# Altium PCB Dongle2.PcbDoc
Units mil, origin at the board's own origin, x right, y up, seen from the top; angles counter-clockwise.
Board outline 6000 x 4000 mil, 2 copper layers (Top Layer, Bottom Layer); 39 components, 34 nets, 174 pads, 0 vias.
Unrouted connection lines stored in the file: 99.
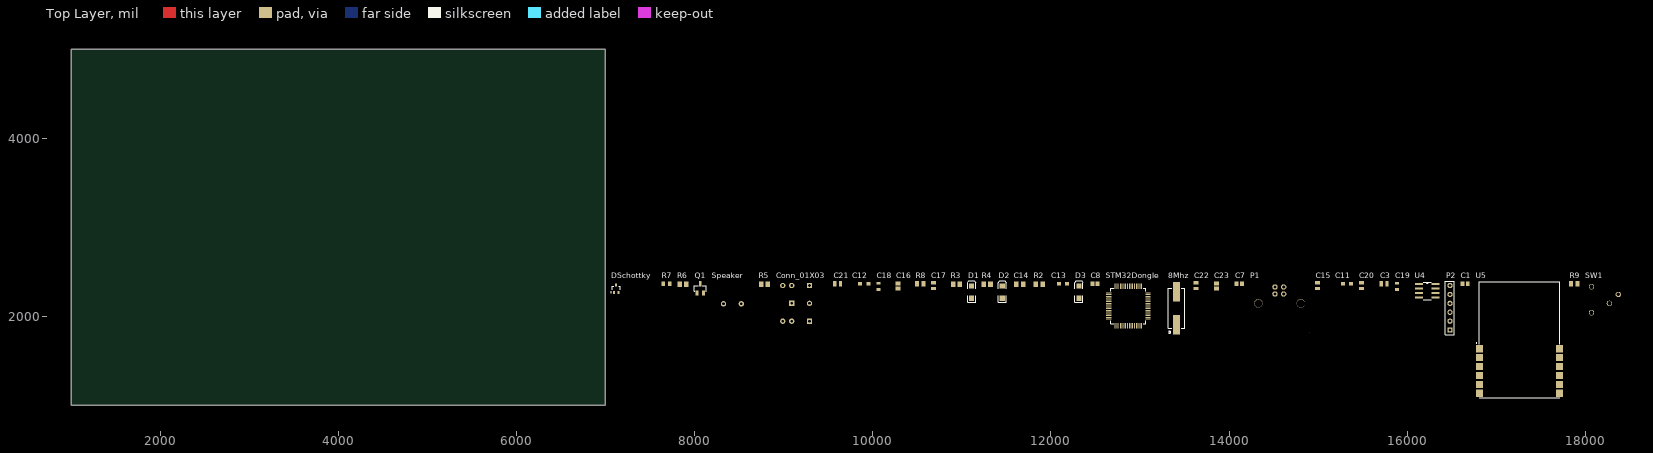
[diagram p0: Top Layer view]
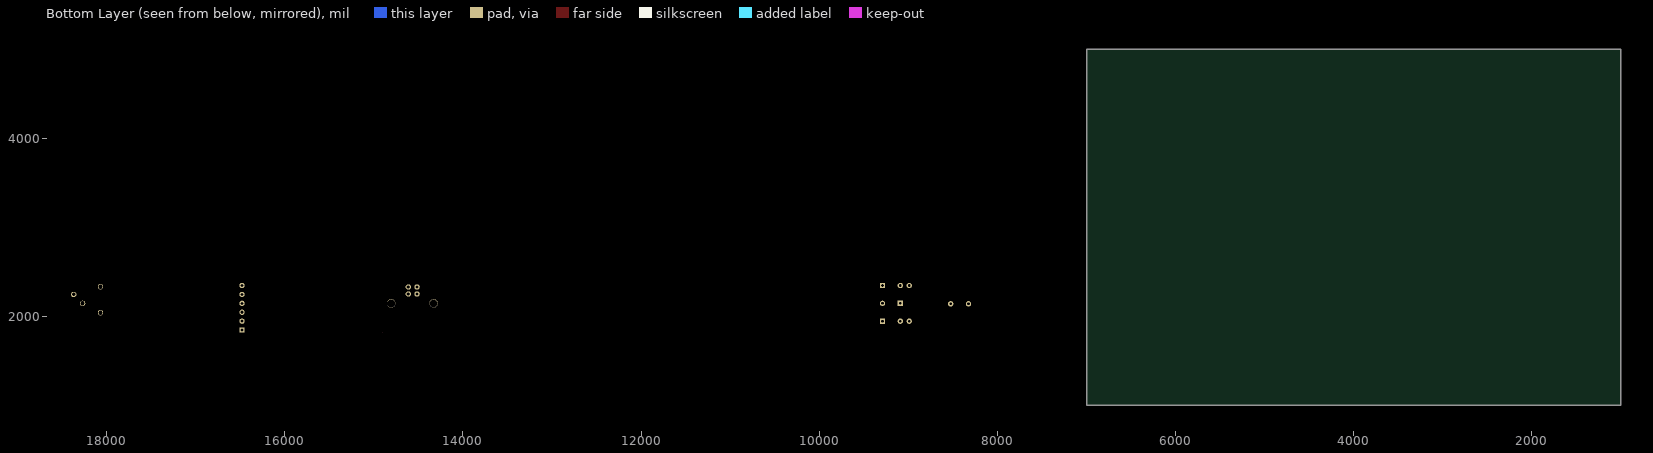
[diagram p1: Bottom Layer view, seen from below]

## Layer stack, top to bottom
Top Solder: solder mask 0.4, Solder Resist, Dk 3.5
Top Layer: signal copper 1.4
Dielectric 1: dielectric 12.6, FR-4, Dk 4.8
Bottom Layer: signal copper 1.4
Bottom Solder: solder mask 0.4, Solder Resist, Dk 3.5

## Board outline
1000,1000 7000,1000 7000,5000 1000,5000

## Design rules (kind name [scope] priority, off if disabled: settings)
Clearance [All] p1: gap=10
PolygonConnect [All] p1: connectstyle=Relief reliefconductorwidth=10 reliefentries=4 polygonreliefangle="90 Angle" airgapwidth=10
RoomDefinition Dongle [InComponentClass('Dongle')] p1: confinementstyle=ConfineIn formatcopy=TRUE lockcomponents=FALSE outline 7045,1060 18455,1060 18455,2505 7045,2505
RoutingVias [All] p1: holewidth=28 width=50 viastyle="Through Hole" minholewidth=28 minwidth=50 maxholewidth=28 maxwidth=50
SolderMaskExpansion [All] p1: expansion=4
Width [All] p1: maxlimit=10 minlimit=10 preferedwidth=10
30 further rules are at their usual default settings.

## Components (designator, comment, footprint, x,y, rotation, side; value= is the part's Value field where it differs from the comment)
8Mhz "X1" XTAL_ABLS2-24.000MHZ-D4YF-T 13410,2090 r90 top
C1 "Cap Pol3" C0805 16650,2365 r0 top
C3 "100nF" CAPC2013X110N 15740,2365 r0 top
C7 "15pF" C0805 14115,2365 r0 top
C8 "Cap Pol3" C0805 12495,2365 r0 top
C11 "1uF" INDC2012X87N 15325,2365 r0 top
C12 "1uF" INDC2012X87N 9905,2365 r0 top
C13 "1uF" INDC2012X87N 12135,2365 r0 top
C14 "10nF" CAPC2012X135N 11650,2360 r0 top
C15 "100nf" CAPC2013X110N 14995,2345 r90 top
C16 "Cap Pol3" C0805 10285,2340 r90 top
C17 "100nF" CAPC2013X110N 10680,2345 r90 top
C18 "4.7uF" 0805 10065,2335 r90 top
C19 "4.7uF" 0805 15885,2335 r90 top
C20 "100nF" CAPC2013X110N 15485,2345 r90 top
C21 "100nF" CAPC2013X110N 9605,2365 r0 top
C22 "100nF" CAPC2013X110N 13630,2345 r90 top
C23 "Cap Pol3" C0805 13860,2340 r90 top
Conn_01X03 "K1" PCBComponent_1#1 8915,2385 r0 top
D1 "LED2" 3.2X1.6X1.1 11110,2270 r90 top
D2 "LED2" 3.2X1.6X1.1 11455,2270 r90 top
D3 "LED2" 3.2X1.6X1.1 12315,2270 r90 top
DSchottky "D4" SOT65P210X110-3N 7120,2310 r90 top
P1 "USB_B" PCBComponent_1#2 14005,1995 r0 top
P2 "Header 6" HDR1X6 16480,1845 r90 top
Q1 "BC846A-7-F" SOT23-3 8050,2315 r0 top
R2 "100R" RESC2012X60 11870,2360 r0 top
R3 "100R" RESC2012X60 10940,2360 r0 top
R4 "100R" RESC2012X60 11285,2360 r0 top
R5 "100ohm" RESC2012X60 8785,2360 r0 top
R6 "100ohm" RESC2012X60 7870,2360 r0 top
R7 "2.2kr" RESC2013X65N 7685,2365 r0 top
R8 "1k" CAPC2012X140N 10535,2365 r0 top
R9 "1k" CAPC2012X140N 17875,2365 r0 top
Speaker "Speaker" Speaker 8225,2140 r0 top
STM32Dongle "U1" QFP50P1200X1200X160-64N 12870,2115 r90 top
SW1 "YELSW" PCBComponent_1#3 17520,1945 r0 top
U4 "LD1117D33TR" SOIC127P600X175-8N 16225,2285 r0 top
U5 "MRF24J40MDT-I/RM" XCVR_MRF24J40MDT-I/RM 17260,1385 r0 top

## Footprints (in the part's own frame and the unit in brackets; to place one, negate y for a bottom-side part, rotate by r counter-clockwise, add the part's x,y. Pads: shape width x height; smd on the part's side, far side on the other; paste and mask are expansions set on the pad)
3.2X1.6X1.1 [mm] "SMT LED; 2 Flat Leads"
  rect 1.5x1.5 smd: 1(-1.75,0) 2(1.75,0)
  silkscreen extent -2.9,-1.15 3.2,1.15
0805 [mm]
  rect 0.8x1.2 smd: P1(-0.9,0) P2(0.9,0)
C0805 [mm] "Chip Capacitor, Body 2.0x1.3mm, IPC High Density"
  rect 1.1x1.4 smd: 1(-0.75,0) 2(0.75,0)
  body extent -1.1,-0.72 1.1,0.72, height 1.4
CAPC2012X135N [mm]
  rect 1.3x1.5 smd: 1(-0.95,0) 2(0.95,0)
CAPC2012X140N [mil]
  rect 44x57 smd: 1(-36,0) 2(36,0)
CAPC2013X110N [mil]
  rect 36x57 smd: 1(-32,0) 2(32,0)
HDR1X6 [mm] "Connector; Header; 6 Position"
  rect 1.5x1.5 hole 0.9: 1(0,0)
  round 1.5 hole 0.9: 2(2.54,0) 3(5.08,0) 4(7.62,0) 5(10.16,0) 6(12.7,0)
  silkscreen extent -1.27,-1.27 13.97,1.27
INDC2012X87N [mm]
  rect 1.15x1 smd: 1(-1.175,0) 2(1.175,0)
PCBComponent_1#1 [mil]
  round 60 hole 30: 4(375,-240) 6(175,-440) 7(75,-440) 11(75,-40) 12(175,-40)
  rect 60x60 hole 30: R3(375,-40) S1(175,-240) T2(375,-440)
PCBComponent_1#2 [mil]
  round 60 hole 36.22: 1(608.43,333.62) 2(510,333.74) 3(510,255) 4(608.43,255)
  round 94.49 hole 90.55: 5(325,150) 5(800,150)
  Top Layer lines w10: 900,-179.45 900.28,-179.72
PCBComponent_1#3 [mil]
  round 60 hole 48.03: 1(550,386.73) 3(750,200) 7(550,95)
  round 60 hole 39.37: 10(850,300)
QFP50P1200X1200X160-64N [mil]
  rect 58x11 smd: 1(-221,148) 2(-221,128) 3(-221,108) 4(-221,89) 5(-221,69) 6(-221,49) 7(-221,30) 8(-221,10) 9(-221,-10) 10(-221,-30) 11(-221,-49) 12(-221,-69) 13(-221,-89) 14(-221,-108) 15(-221,-128) 16(-221,-148) 33(221,-148) 34(221,-128) 35(221,-108) 36(221,-89) 37(221,-69) 38(221,-49) 39(221,-30) 40(221,-10) 41(221,10) 42(221,30) 43(221,49) 44(221,69) 45(221,89) 46(221,108) 47(221,128) 48(221,148)
  rect 11x58 smd: 17(-148,-221) 18(-128,-221) 19(-108,-221) 20(-89,-221) 21(-69,-221) 22(-49,-221) 23(-30,-221) 24(-10,-221) 25(10,-221) 26(30,-221) 27(49,-221) 28(69,-221) 29(89,-221) 30(108,-221) 31(128,-221) 32(148,-221) 49(148,221) 50(128,221) 51(108,221) 52(89,221) 53(69,221) 54(49,221) 55(30,221) 56(10,221) 57(-10,221) 58(-30,221) 59(-49,221) 60(-69,221) 61(-89,221) 62(-108,221) 63(-128,221) 64(-148,221)
  silkscreen extent -197,-197 197,197
RESC2012X60 [mm]
  rect 1.3x1.5 smd: 1(-0.95,0) 2(0.95,0)
RESC2013X65N [mil]
  rect 40x55 smd: 1(-37,0) 2(37,0)
SOIC127P600X175-8N [mil]
  rect 86x22 smd: 1(-93,75) 2(-93,25) 3(-93,-25) 4(-93,-75) 5(93,-75) 6(93,-25) 7(93,25) 8(93,75)
  silkscreen extent -46,-98 46,99
SOT23-3 [mm]
  rect 0.8x1.5 smd: 1(-0.6,-1.35) 2(1.3,-1.35) 3(0.35,1.25)
  silkscreen extent -1.4,-0.85 2.1,0.75
SOT65P210X110-3N [mm] "SOT23, 3-Leads, Body 2.00x2.10mm, Pitch 0.65mm, IPC Medium Density"
  rect 0.8x0.55 smd: 1(-1.075,0.65) 2(-1.075,-0.65) 3(1.075,0)
  silkscreen extent -1.2,-1.1 0.67,1.6, body extent -0.67,-1.1 0.67,1.1, height 1.1
Speaker [mil]
  round 60 hole 30: 1(100,0) 2(300,0)
XCVR_MRF24J40MDT-I/RM [mil]
  rect 80x80 smd: 1(-450,250) 2(-450,150) 3(-450,50) 4(-450,-50) 5(-450,-150) 6(-450,-250) 7(450,-250) 8(450,-150) 9(450,-50) 10(450,50) 11(450,150) 12(450,250)
  silkscreen extent -486,-300 450,1000
XTAL_ABLS2-24.000MHZ-D4YF-T [mm]
  rect 5.6x2.1 smd: 1(-4.75,0) 2(4.75,0)
  silkscreen extent -7.15,-2.35 5.7,2.35

## Part data
8Mhz: library part 8Mhz
C1 C8 C16 C23: "Polarized Capacitor (Surface Mount)"
C3 C15 C17 C20 C21 C22: library part C0805C104K5RACTU, "Capacitor; Ceramic; Cap; .100UF ; Tol+-10%; SMD; Vol-Rtg 50V; X7R, Tape/Reel"
C7: library part "Cap Pol3", "Polarized Capacitor (Surface Mount)"
C11 C12 C13: library part C2012X5R1E105M085AC, "CAP CER 1UF 25V X5R 0805"
C14: library part GRM216R71H103KA01D, "CAP CER 10000PF 50V X7R 0805"
Conn_01X03: library part Conn_01X03
D1 D2 D3: "Typical RED, GREEN, YELLOW, AMBER GaAs LED"
DSchottky: library part DSchottky
P1 Speaker: library part Component_1
P2: "Header, 6-Pin"
Q1: "TRANS NPN 65V 0.1A SOT23-3"
R2 R3 R4 R5 R6: library part RC0805FR-07100RL, "RES SMD 100 OHM 1% 1/8W 0805"
R7: library part RC0805FR-072K2L, "RES SMD 2.2K OHM 1% 1/8W 0805"
R8 R9: library part 1kohm, "1276-5272-1-ND"
STM32Dongle: library part STM32Dongle, "497-11907-ND"
U4: "IC REG LINEAR 3.3V 800MA 8SO"
U5: "2.4 GHz IEEE 802.15.4 Certified Transceiver Module (+20 dBm), 12 MODULE Varies T/R"

## Nets (pads, with @x,y where several pads share a name; then routed paths per layer and width w, separated by ;. In a path a pad name is that pad's centre, name@x,y a point inside that pad or via, vN(x,y) a via of type N, cw(c..) or ccw(c..) an arc to the next point about the centre after c; other vN are vias at no path point)
3.3V: C1.1 C3.1 C12.1 C13.1 C14.1 C15.1 C17.1 C18.P1 C19.P1 C21.2 C22.1 DSchottky.1 P2.1 Speaker.1 STM32Dongle.1 STM32Dongle.13 STM32Dongle.14 STM32Dongle.15 STM32Dongle.19 STM32Dongle.20 STM32Dongle.21 STM32Dongle.32 STM32Dongle.48 STM32Dongle.64 SW1.3 U4.3
5V: C11.2 P1.1 U4.4
GND: C1.2 C3.2 C7.2 C8.2 C11.1 C12.2 C13.2 C14.2 C15.2 C16.2 C17.2 C18.P2 C19.P2 C20.2 C21.1 C22.2 C23.2 D1.2 D2.2 D3.2 P1.4 P1.5 P2.3 Q1.2 R7.1 R9.1 STM32Dongle.12 STM32Dongle.17 STM32Dongle.18 STM32Dongle.28 STM32Dongle.61 STM32Dongle.62 STM32Dongle.63 U4.1 U5.11 U5.12
Net8Mhz_1: 8Mhz.1 C7.1 STM32Dongle.5
Net8Mhz_2: 8Mhz.2 C8.1 STM32Dongle.6
NetC16_1: C16.1 STM32Dongle.31
NetC23_1: C23.1 STM32Dongle.47
NetConn_01X03_R3: Conn_01X03.R3 R6.2
NetConn_01X03_S1: Conn_01X03.S1 R7.2 STM32Dongle.27
NetConn_01X03_T2: Conn_01X03.T2 R5.2
NetD1_1: D1.1 R3.2
NetD2_1: D2.1 R4.2
NetD3_1: D3.1 R2.2
NetDSchottky_3: DSchottky.3 Q1.3 Speaker.2
NetP1_2: P1.2 STM32Dongle.44
NetP1_3: P1.3 STM32Dongle.45
NetQ1_1: Q1.1 R8.1
NetR2_1: R2.1 STM32Dongle.35
NetR3_1: R3.1 STM32Dongle.33
NetR4_1: R4.1 STM32Dongle.34
NetR5_1: R5.1 STM32Dongle.26
NetR6_1: R6.1 STM32Dongle.25
NetR8_2: R8.2 STM32Dongle.16
NetR9_2: R9.2 STM32Dongle.60 SW1.1
NetSTM32Dongle_50: STM32Dongle.50 U5.8
NetSTM32Dongle_53: STM32Dongle.53 U5.4
NetSTM32Dongle_55: STM32Dongle.55 U5.6
NetSTM32Dongle_56: STM32Dongle.56 U5.7
NetSTM32Dongle_57: STM32Dongle.57 U5.5
NetSTM32Dongle_58: STM32Dongle.58 U5.3
NetSTM32Dongle_59: STM32Dongle.59 U5.2
NRST: P2.5 STM32Dongle.7
SWCLK: P2.2 STM32Dongle.49
SWDIO: P2.4 STM32Dongle.46
pads on no net: C20.1 Conn_01X03.4 Conn_01X03.6 Conn_01X03.7 Conn_01X03.11 Conn_01X03.12 DSchottky.2 P2.6 STM32Dongle.2 STM32Dongle.3 STM32Dongle.4 STM32Dongle.8 STM32Dongle.9 STM32Dongle.10 STM32Dongle.11 STM32Dongle.22 STM32Dongle.23 STM32Dongle.24 STM32Dongle.29 STM32Dongle.30 STM32Dongle.36 STM32Dongle.37 STM32Dongle.38 STM32Dongle.39 STM32Dongle.40 STM32Dongle.41 STM32Dongle.42 STM32Dongle.43 STM32Dongle.51 STM32Dongle.52 STM32Dongle.54 SW1.7 SW1.10 U4.2 U4.5 U4.6 U4.7 U4.8 U5.1 U5.9 U5.10

## Text inside footprints (layer, text, board x,y; h text height)
U5: Mechanical 1 "PCB EDGE" at 16819.44,2025.99 h73.82